# EAGLE board TRV_ANAREN_V0.3 (EAGLE 6.3)
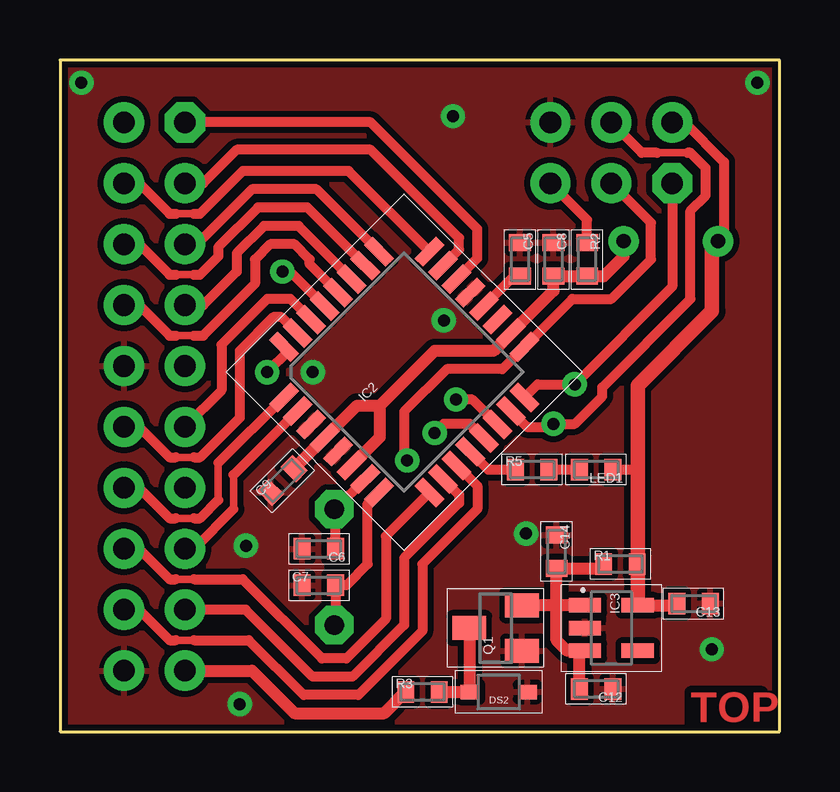
[diagram p0: board, top side]
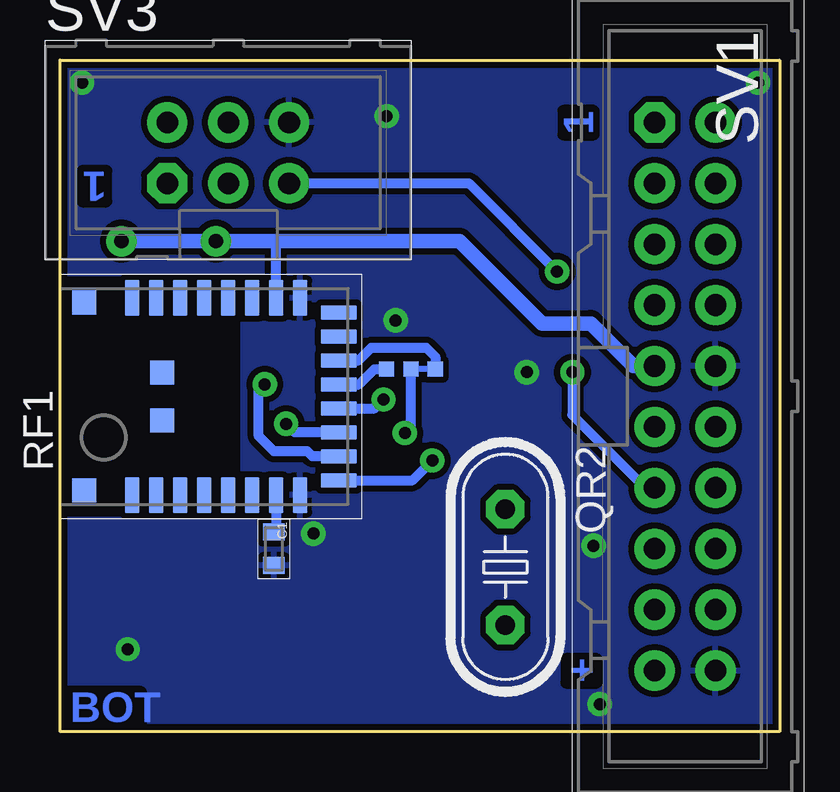
[diagram p1: board, bottom side, seen from below]

Size 30 x 28 mm. Coordinates in mm from the lower left corner, seen from the top.
Outline: 0,0 30,0 30,28 0,28 0,0
Copper layers (1*16): Top 0.035mm / dielectric 1.5mm / Bottom 0.035mm
Design rules "default *": minimum track width 8mil, minimum drill 0.3mm, track to track 10mil, track to pad 10mil, pad to pad 10mil, via to via 10mil, smd to smd 10mil, copper to edge 10mil, drill to drill 8mil, minimum pad ring 5mil, minimum via ring 8mil, stop-mask expansion 4mil, vias tented up to drill 25mil, thermal gap 8mil

## Footprints (pad centres in the part's own frame; a part is rotated, then mirrored left to right if it is on the bottom)
BR = smd 0.635 x 0.635: L -1.016,0; M 0,0; R 1.016,0
0603 = smd 0.7 x 0.9: 1 -0.697,0; 2 0.697,0
SOD323 = smd 0.8 x 0.6: A 1.2,0; C -1.2,0
TQFP32-08 = smd 1.27 x 0.5: 1 -4.293,2.8; 2 -4.293,2; 3 -4.293,1.2; 4 -4.293,0.4; 5 -4.293,-0.4; 6 -4.293,-1.2; 7 -4.293,-2; 8 -4.293,-2.8; 17 4.293,-2.8; 18 4.293,-2; 19 4.293,-1.2; 20 4.293,-0.4; 21 4.293,0.4; 22 4.293,1.2; 23 4.293,2; 24 4.293,2.8 | smd 0.5 x 1.27: 9 -2.8,-4.293; 10 -2,-4.293; 11 -1.2,-4.293; 12 -0.4,-4.293; 13 0.4,-4.293; 14 1.2,-4.293; 15 2,-4.293; 16 2.8,-4.293; 25 2.8,4.293; 26 2,4.293; 27 1.2,4.293; 28 0.4,4.293; 29 -0.4,4.293; 30 -1.2,4.293; 31 -2,4.293; 32 -2.8,4.293
SOT23-5 = smd 0.6 x 1.35: 1 -0.95,-1.101; 2 0,-1.101; 3 0.95,-1.101; 4 0.95,1.101; 5 -0.951,1.101
SOT23 = smd 1 x 1.4: 1 -0.95,-1.1; 2 0.95,-1.1; 3 0,1.1
HC49U-V = drill 0.813 pad 1.6 octagon: 1 -2.413,0; 2 2.413,0
ANAREN_C = smd 1.5 x 0.61: 1 -4.11,2.6; 2 -4.11,1.6; 3 -4.11,0.6; 4 -4.11,-0.4; 5 -4.11,-1.4; 6 -4.11,-2.4; 7 -4.11,-3.4; 8 -4.11,-4.4; 17 4.11,-4.4; 18 4.11,-3.4; 19 4.11,-2.4; 20 4.11,-1.4; 21 4.11,-0.4; 22 4.11,0.6; 23 4.11,1.6; 24 4.11,2.6 | smd 0.61 x 1.5: 9 -3.5,-6; 10 -2.5,-6; 11 -1.5,-6; 12 -0.5,-6; 13 0.5,-6; 14 1.5,-6; 15 2.5,-6; 16 3.5,-6 | smd 1 x 1: PL2 -3.91,4.6; PL3 3.91,4.6; PL4 -1,1.35; PL5 1,1.35
ML20 = drill 0.9 pad 1.676 octagon: 1 -11.43,-1.27 | drill 0.9 pad 1.676: 2 -11.43,1.27; 3 -8.89,-1.27; 4 -8.89,1.27; 5 -6.35,-1.27; 6 -6.35,1.27; 7 -3.81,-1.27; 8 -3.81,1.27; 9 -1.27,-1.27; 10 -1.27,1.27; 11 1.27,-1.27; 12 1.27,1.27; 13 3.81,-1.27; 14 3.81,1.27; 15 6.35,-1.27; 16 6.35,1.27; 17 8.89,-1.27; 18 8.89,1.27; 19 11.43,-1.27; 20 11.43,1.27
ML6 = drill 0.9 pad 1.676 octagon: 1 -2.54,-1.27 | drill 0.9 pad 1.676: 2 -2.54,1.27; 3 0,-1.27; 4 0,1.27; 5 2.54,-1.27; 6 2.54,1.27

## Placement (x,y rotation side)
BR1  BR  [BR]  15.37,15.11 180 bottom
C1  n.b.  [0603]  21.08,7.62 270 bottom
C5  100n  [0603]  19.18,19.68 270 top
C6  22p  [0603]  10.79,7.62 180 top
C7  22p  [0603]  10.79,6.1 0 top
C8  100n  [0603]  20.57,19.68 270 top
C9  100n  [0603]  9.27,10.46 45 top
C12  1u  [0603]  22.35,1.78 180 top
C13  1u  [0603]  26.42,5.33 180 top
C14  100n  [0603]  20.7,7.5 270 top
DS2  PESD12VL1BA  [SOD323]  18.29,1.65 180 top
IC2  MEGA168PA-AU  [TQFP32-08]  14.35,14.99 45 top
IC3  LP2992-IM5-3.3  [SOT23-5]  22.99,4.32 270 top
LED1  LEDR  [0603]  22.35,10.92 180 top
Q1  IRLM9301  [SOT23]  18.16,4.32 90 top
QR2  16.000  [HC49U-V]  11.43,6.86 270 bottom
R1  n.b  [0603]  23.37,6.99 0 top
R2  10k  [0603]  21.97,19.68 270 top
R3  0R  [0603]  15.11,1.65 0 top
R5  330R  [0603]  19.68,10.92 0 top
RF1  [ANAREN_C]  24.38,13.97 90 bottom
SV1  ISP  [ML20]  3.94,13.97 270 bottom
SV3  ISP  [ML6]  22.99,24.13 0 bottom

## Library data of the parts
BR1 SV1 SV3 = Conn
C1 C5-C9 C12-C14 R1-R3 R5 = RCL
DS2 = Diode
IC2 = atmel
IC3 = DCDC
LED1 = Optic
Q1 = Transistor
QR2 = QUARTZ
RF1 = RF

## Nets
+3V3: C8.2 C9.2 C13.2 IC2.4 IC2.6 IC2.18 IC3.5 LED1.1 R1.2 R2.2 RF1.18 SV1.9 SV3.2
GDO0: BR1.R RF1.13
GDO2: BR1.L RF1.14
GND: C1.2 C5.1 C6.2 C7.1 C8.1 C9.1 C12.1 C13.1 C14.1 DS2.C IC2.3 IC2.5 IC2.21 IC3.2 Q1.1 RF1.8 RF1.17 SV1.10 SV1.20 SV3.6
MISO: IC2.16 RF1.10 SV3.1
MOSI: IC2.15 RF1.11 SV3.4
N$1: IC2.12 R5.1
N$2: C1.1 RF1.7
N$3: IC2.22 SV1.1
N$5: DS2.A Q1.3 R3.2
N$6: C5.2 IC2.20
N$12: C12.2 C14.2 IC3.1 IC3.3 Q1.2 R1.1
N$18: C6.1 IC2.7 QR2.1
N$19: C7.2 IC2.8 QR2.2
N$21: LED1.2 R5.2
N$23: R3.1 SV1.19
PC0: IC2.23 SV1.3
PC1: IC2.24 SV1.4
PC2: IC2.25 SV1.5
PC3: IC2.26 SV1.6
PC4: IC2.27 SV1.7
PC5: IC2.28 SV1.8
PD2: IC2.32 SV1.13
PD3: IC2.1 SV1.14
PD4: IC2.2 SV1.15
PD5: IC2.9 SV1.16
PD6: IC2.10 SV1.17
PD7: IC2.11 SV1.18
RIRQ: BR1.M IC2.13
RSEL: IC2.14 RF1.12
RST: IC2.29 R2.1 SV3.5
RXD: IC2.30 SV1.11
SCK: IC2.17 RF1.9 SV3.3
TXD: IC2.31 SV1.12

## Tracks (layer width: path | path; a pad name or v marks a point on that pad's centre or on a via)
+3V3  (via drill 0.6 pad 1.27)
  Top 0.406: IC2.4 | SV3.2 26.04,25.4 27.69,23.75 27.69,20.7 v27.43,20.45 | LED1.1 24.09,10.92 | 25.65,5.27 C13.2 | R1.2 24.09,6.99
  Top 0.508: v23.5,20.45 23.5,19.81 22.67,18.99 R2.2 C8.2 20.57,18.38 IC2.18 18.07,15.88 15.62,15.88 13.34,13.59 | IC2.6 13.34,12.27 13.34,13.59 | 13.34,13.59 12.39,13.59 IC2.4 C9.2 | IC3.5 25.65,5.27
  Top 0.61: IC3.5 24.09,6.99 24.09,10.92 24.09,14.44 27.18,17.53 27.18,20.19 v27.43,20.45
  Bottom 0.406: RF1.18 20.98,20.42 20.95,20.45
  Bottom 0.61: v27.43,20.45 v23.5,20.45 20.95,20.45 13.34,20.45 9.91,17.02 7.87,17.02 6.1,15.24 SV1.9
GDO0
  Bottom 0.406: RF1.13 17.53,14.47 16.89,15.11 BR1.R
GDO2
  Bottom 0.406: RF1.14 17.55,15.47 17.02,16 14.73,16 14.35,15.62 BR1.L
GND  (via drill 0.5 pad 1.02)
  other vias: 7.75,7.75 0.89,27.05 7.49,1.14 29.08,27.05 16,17.14 10.54,14.99 27.18,3.43 19.43,8.26 16.38,25.65
  pour Top: 0,0 30,0 30,28 0,28
  pour Bottom: 0,0 30,0 30,28 0,28
MISO  (via drill 0.5 pad 1.02)
  Top 0.406: SV3.1 25.53,18.54 v21.46,14.48 19.91,14.48 IC2.16
  Bottom 0.406: RF1.10 19.47,11.47 19.68,11.68 21.08,11.68 21.72,12.32 21.72,14.22 v21.46,14.48
MOSI  (via drill 0.5 pad 1.02)
  Top 0.305: 26.16,24.13 24.89,24.13
  Top 0.406: SV3.4 24.26,24.13 24.89,24.13 | 26.16,24.13 26.29,24.13 26.92,23.5 26.92,22.35 26.29,21.72 26.29,18.03 22.61,14.35 22.61,13.97 21.46,12.83 v20.57,12.83 20.45,12.7 19.46,12.7 IC2.15
  Bottom 0.406: RF1.11 20.22,12.47 v20.57,12.83
N$1
  Top 0.406: IC2.12 17.85,10.92 R5.1
N$2
  Bottom 0.406: RF1.7 20.98,8.41 C1.1
N$3
  Top 0.406: IC2.22 17.4,19.73 17.4,20.95 12.95,25.4 SV1.1
N$5
  Top 0.406: 17.09,4.29 Q1.3
  Top 0.508: R3.2 DS2.A 17.09,4.29
N$6
  Top 0.406: IC2.20 18.92,18.99 C5.2
N$12
  Top 0.406: IC3.3 21.72,3.37 21.66,3.31 | 22.49,6.8 R1.1 | C14.2 | Q1.2
  Top 0.508: IC3.1 20.7,5.27 | 20.7,5.27 Q1.2 | 21.72,3.37 21.14,3.37 20.7,3.81 20.7,5.27 | C12.2 21.66,3.31 | C14.2 22.49,6.8 | 20.7,5.27 C14.2
N$18
  Top 0.406: IC2.7 11.46,9.27 QR2.1 11.49,9.21 C6.1
N$19
  Top 0.406: IC2.8 12.83,9.5 12.83,6.99 11.94,6.1 C7.2 11.49,4.51 QR2.2
N$21
  Top 0.406: R5.2 LED1.2
N$23
  Top 0.508: SV1.19 8,2.54 9.78,0.76 13.53,0.76 R3.1
PC0
  Top 0.406: IC2.23 16.64,20.1 16.64,20.57 12.95,24.26 7.37,24.26 5.97,22.86 SV1.3
PC1
  Top 0.305: 4.83,21.59 5.59,21.59
  Top 0.406: IC2.24 12.04,23.37 7.62,23.37 5.84,21.59 5.59,21.59 | SV1.4 3.3,22.86 4.57,21.59 4.83,21.59
PC2
  Top 0.406: SV1.5 5.71,20.32 8,22.61 10.69,22.61 IC2.25
PC3
  Top 0.305: 4.83,19.05 5.59,19.05
  Top 0.406: SV1.6 3.3,20.32 4.57,19.05 4.83,19.05 | 5.59,19.05 5.84,19.05 6.6,19.81 6.6,20.19 8.26,21.84 10.32,21.84 IC2.26
PC4
  Top 0.406: SV1.7 5.97,17.78 7.37,19.18 7.37,19.94 8.51,21.08 9.95,21.08 IC2.27
PC5
  Top 0.305: 4.83,16.51 5.59,16.51
  Top 0.406: SV1.8 3.3,17.78 4.57,16.51 4.83,16.51 | 5.59,16.51 5.97,16.51 8.13,18.67 8.13,19.68 8.76,20.32 9.78,20.32 10.41,19.68 10.41,19.49 IC2.28
PD2  (via drill 0.5 pad 1.02)
  Top 0.406: IC2.32 9.36,16.04 9.53,15.88 v8.64,14.99
  Bottom 0.406: v8.64,14.99 8.64,13.21 5.59,10.16 SV1.13
PD3
  Top 0.305: 6.6,11.2 6.6,9.65 | 4.83,8.89 5.59,8.89
  Top 0.406: IC2.1 6.6,11.2 | 6.6,9.65 5.84,8.89 5.59,8.89 | SV1.14 3.3,10.16 4.57,8.89 4.83,8.89
PD4
  Top 0.305: 7.24,10.7 7.24,9.27
  Top 0.406: 7.24,9.27 5.59,7.62 SV1.15 | IC2.2 7.24,10.7
PD5
  Top 0.305: 4.83,6.35 5.59,6.35
  Top 0.406: IC2.9 13.59,8.15 13.59,4.7 11.94,3.05 10.92,3.05 7.62,6.35 5.59,6.35 | SV1.16 3.3,7.62 4.57,6.35 4.83,6.35
PD6
  Top 0.406: IC2.10 16.64,9.87 16.64,9.53 14.35,7.24 14.35,4.45 12.19,2.29 10.54,2.29 7.75,5.08 SV1.17
PD7
  Top 0.305: 4.83,3.81 5.59,3.81
  Top 0.406: IC2.11 17.4,10.24 17.4,9.27 15.11,6.99 15.11,4.19 12.45,1.52 10.16,1.52 7.87,3.81 5.59,3.81 | SV1.18 3.3,5.08 4.57,3.81 4.83,3.81
RIRQ  (via drill 0.5 pad 1.02)
  Top 0.406: IC2.13 17.08,12.83 16,12.83 v15.62,12.45
  Bottom 0.406: v15.62,12.45 15.37,12.7 BR1.M
RSEL  (via drill 0.5 pad 1.02)
  Top 0.406: IC2.14 17.19,13.84 v16.51,13.84
  Bottom 0.406: RF1.12 16.88,13.47 v16.51,13.84
RST  (via drill 0.5 pad 1.02)
  Top 0.406: IC2.29 9.59,19.18 v9.27,19.18 | R2.1 21.97,21.34 SV3.5
  Bottom 0.406: SV3.5 12.95,22.86 v9.27,19.18
RXD
  Top 0.406: IC2.30 9.61,18.03 8.64,18.03 6.73,16.13 6.73,14.22 SV1.11
SCK  (via drill 0.5 pad 1.02)
  Top 0.406: SV3.3 24.64,21.21 24.64,19.68 22.99,18.03 21.36,18.03 IC2.17 18.44,15.11 16.13,15.11 14.35,13.34 14.35,11.43 v14.48,11.3
  Bottom 0.406: RF1.9 15.31,10.47 v14.48,11.3
TXD
  Top 0.305: 4.83,11.43 5.59,11.43
  Top 0.406: IC2.31 9.24,17.27 8.89,17.27 7.49,15.88 7.49,13.08 5.84,11.43 5.59,11.43 | SV1.12 3.3,12.7 4.57,11.43 4.83,11.43

## Text on the board
Top: TOP
Bottom: 1 | 1 | + | BOT